# EAGLE board CT_schematic (EAGLE 7.6.0)

Size 100 x 80 mm. Coordinates in mm from the lower left corner, seen from the top.
Outline: 0,0 100,0 100,80 0,80 0,0
Copper layers (1*16): Top 0.035mm / dielectric 1.5mm / Bottom 0.035mm
Design rules "default": minimum track width 10mil, minimum drill 24mil, track to track 8mil, track to pad 8mil, pad to pad 8mil, via to via 8mil, smd to smd 8mil, copper to edge 40mil, drill to drill 8mil, minimum pad ring 10mil, minimum via ring 8mil, stop-mask expansion 4mil, vias tented up to drill 0mil, thermal gap 10mil

## Footprints (pad centres in the part's own frame; a part is rotated, then mirrored left to right if it is on the bottom)
C0603 = smd 0.8 x 0.8: 1 -0.762,0; 2 0.762,0
C0402 = smd 0.5 x 0.5: 1 -0.508,0; 2 0.508,0
C0805 = smd 1.2 x 1.3: 1 -1.016,0; 2 1.016,0
C1210 = smd 1.2 x 2.5: 1 -1.524,0; 2 1.524,0
EXV-9H = smd 3.505 x 1.676: 1 -2.857,0; 2 2.857,0
L0603 = smd 0.8 x 0.8: 1 -0.762,0; 2 0.762,0
L1210 = smd 1.2 x 2.5: 1 -1.524,0; 2 1.524,0
PJ-037B_PACKAGE = drill 3.7 square: 1 12,0 | drill 3.2 square: 2 6,0
R0603 = smd 0.8 x 0.8: 1 -0.762,0; 2 0.762,0
LQFP64 = smd 0.3 x 1.2: 1 -3.75,-5.75; 2 -3.25,-5.75; 3 -2.75,-5.75; 4 -2.25,-5.75; 5 -1.75,-5.75; 6 -1.25,-5.75; 7 -0.75,-5.75; 8 -0.25,-5.75; 9 0.25,-5.75; 10 0.75,-5.75; 11 1.25,-5.75; 12 1.75,-5.75; 13 2.25,-5.75; 14 2.75,-5.75; 15 3.25,-5.75; 16 3.75,-5.75; 33 3.75,5.75; 34 3.25,5.75; 35 2.75,5.75; 36 2.25,5.75; 37 1.75,5.75; 38 1.25,5.75; 39 0.75,5.75; 40 0.25,5.75; 41 -0.25,5.75; 42 -0.75,5.75; 43 -1.25,5.75; 44 -1.75,5.75; 45 -2.25,5.75; 46 -2.75,5.75; 47 -3.25,5.75; 48 -3.75,5.75 | smd 1.2 x 0.3: 17 5.75,-3.75; 18 5.75,-3.25; 19 5.75,-2.75; 20 5.75,-2.25; 21 5.75,-1.75; 22 5.75,-1.25; 23 5.75,-0.75; 24 5.75,-0.25; 25 5.75,0.25; 26 5.75,0.75; 27 5.75,1.25; 28 5.75,1.75; 29 5.75,2.25; 30 5.75,2.75; 31 5.75,3.25; 32 5.75,3.75; 49 -5.75,3.75; 50 -5.75,3.25; 51 -5.75,2.75; 52 -5.75,2.25; 53 -5.75,1.75; 54 -5.75,1.25; 55 -5.75,0.75; 56 -5.75,0.25; 57 -5.75,-0.25; 58 -5.75,-0.75; 59 -5.75,-1.25; 60 -5.75,-1.75; 61 -5.75,-2.25; 62 -5.75,-2.75; 63 -5.75,-3.25; 64 -5.75,-3.75
SOIC-8 = smd 1.6 x 0.6: 1 -2.7,1.905 | smd 1.55 x 0.6: 2 -2.7,0.635; 3 -2.7,-0.635; 4 -2.7,-1.905; 5 2.7,-1.905; 6 2.7,-0.635; 7 2.7,0.635; 8 2.7,1.905
SAMTEC_FTSH-105-01-L-DV-K = smd 0.762 x 2.794: 1 -2.54,-2.032; 2 -2.54,2.032; 3 -1.27,-2.032; 4 -1.27,2.032; 5 0,-2.032; 6 0,2.032; 7 1.27,-2.032; 8 1.27,2.032; 9 2.54,-2.032; 10 2.54,2.032
SSOP-20 = smd 1.651 x 0.432: 1 -3.48,2.925; 2 -3.48,2.275; 3 -3.48,1.625; 4 -3.48,0.975; 5 -3.48,0.325; 6 -3.48,-0.325; 7 -3.48,-0.975; 8 -3.48,-1.625; 9 -3.48,-2.275; 10 -3.48,-2.925; 11 3.48,-2.925; 12 3.48,-2.275; 13 3.48,-1.625; 14 3.48,-0.975; 15 3.48,-0.325; 16 3.48,0.325; 17 3.48,0.975; 18 3.48,1.625; 19 3.48,2.275; 20 3.48,2.925
HTSS-105-01-G-D = drill 1 pad 1.8 square: 1 0,0 | drill 1 pad 1.8: 2 0,2.54; 3 2.54,0; 4 2.54,2.54; 5 5.08,0; 6 5.08,2.54; 7 7.62,0; 8 7.62,2.54; 9 10.16,0; 10 10.16,2.54
QFN-28 = smd 0.813 x 0.305: 1 -2.451,1.5; 2 -2.451,1; 3 -2.451,0.5; 4 -2.451,0; 5 -2.451,-0.5; 6 -2.451,-1; 7 -2.451,-1.5; 15 2.451,-1.5; 16 2.451,-1; 17 2.451,-0.5; 18 2.451,0; 19 2.451,0.5; 20 2.451,1; 21 2.451,1.5 | smd 0.305 x 0.813: 8 -1.5,-2.451; 9 -1,-2.451; 10 -0.5,-2.451; 11 0,-2.451; 12 0.5,-2.451; 13 1,-2.451; 14 1.5,-2.451; 22 1.5,2.451; 23 1,2.451; 24 0.5,2.451; 25 0,2.451; 26 -0.5,2.451; 27 -1,2.451; 28 -1.5,2.451 | smd 3.607 x 3.607: 29 0,0
SJ-43515TS-SMT-TR = smd 2.2 x 3: 1 0.6,-7.4; 4 3.4,-7.4 | smd 3 x 3: 2 12.8,-7.4; 5 17,-3 | smd 2 x 3: 3 5.3,0; 6 2.5,0 | drill 1.8: P$7 4.5,-3.69; P$8 11.54,-3.69
ABLS-25.000MHZ-B2F-T = smd 5.6 x 2.8: 1 -3.81,0; 2 5.69,0
ABLS-12.288MHZ-B4-T = smd 5.6 x 2.8: 1 -3.81,0; 2 5.69,0
ASEK = smd 1.4 x 1: 1 -1.1,-0.8; 2 1.1,-0.8; 3 1.1,0.8; 4 -1.1,0.8
WSON-8 = smd 0.3 x 0.6: 1 -0.75,0; 2 0.05,0; 3 0.85,0; 4 1.65,0; 5 1.65,3.8; 6 0.85,3.8; 7 0.05,3.8; 8 -0.75,3.8 | smd 3 x 2.6: PAD 0.45,1.9
SON-6 = smd 0.55 x 0.3: 1 -0.355,0.5 | smd 0.52 x 0.3: 2 -0.37,0; 3 -0.37,-0.5; 4 0.37,-0.5; 5 0.37,0; 6 0.37,0.5
SW_4-1437565-2 = smd 1.4 x 2.1: 1 -2.23,4.55; 2 -2.23,-4.55; 3 2.23,4.55; 4 2.23,-4.55
LGM67K-G1J2-24-Z = smd 0.8 x 1.4: A -2,0; C 0,0
NC7SZ125M5X = smd 1.3 x 0.7: 1 -1.3,0.95; 2 -1.3,0; 3 -1.3,-0.95; 4 1.3,-0.95; 5 1.3,0.95
DUMMY_PACKAGE_186 = drill 0.3: 1 0,-1; 2 1.5,-1; 3 3,-1

## Placement (x,y rotation side)
C1  1e-06  [C0603]  -48.26,72.39 0 top  (outside the outline)
C2  1e-07  [C0603]  -52.07,72.39 0 top  (outside the outline)
C3  1e-07  [C0603]  -55.88,72.39 0 top  (outside the outline)
C4  1e-07  [C0603]  -59.69,72.39 0 top  (outside the outline)
C5  1e-07  [C0603]  -63.5,72.39 0 top  (outside the outline)
C6  1e-07  [C0603]  -67.31,72.39 0 top  (outside the outline)
C7  4.7e-06  [C0603]  -44.45,72.39 0 top  (outside the outline)
C8  1e-08  [C0603]  -71.12,72.39 0 top  (outside the outline)
C9  1e-06  [C0603]  -74.93,72.39 0 top  (outside the outline)
C10  1e-11  [C0402]  -62.23,77.47 0 top  (outside the outline)
C11  1e-11  [C0402]  -66.04,77.47 0 top  (outside the outline)
C12  1e-08  [C0402]  -69.85,77.47 0 top  (outside the outline)
C13  1e-07  [C0402]  -73.66,77.47 0 top  (outside the outline)
C14  1e-06  [C0603]  -78.74,72.39 0 top  (outside the outline)
C15  1e-06  [C0603]  -15.24,77.47 0 top  (outside the outline)
C16  1e-06  [C0603]  -19.05,77.47 0 top  (outside the outline)
C17  4.7e-06  [C0805]  -53.34,60.96 0 top  (outside the outline)
C18  2.2e-05  [C1210]  -78.74,54.61 0 top  (outside the outline)
C19  2.2e-05  [C1210]  -16.51,60.96 0 top  (outside the outline)
C20  1e-09  [C0402]  -77.47,77.47 0 top  (outside the outline)
C21  1e-09  [C0402]  -81.28,77.47 0 top  (outside the outline)
C22  1e-07  [C0402]  -15.24,82.55 0 top  (outside the outline)
C23  1e-07  [C0402]  -19.05,82.55 0 top  (outside the outline)
C24  1e-07  [C0402]  -22.86,82.55 0 top  (outside the outline)
C25  1e-07  [C0402]  -26.67,82.55 0 top  (outside the outline)
C26  1e-07  [C0402]  -30.48,82.55 0 top  (outside the outline)
C27  1e-05  [C0805]  -58.42,60.96 0 top  (outside the outline)
C28  1e-05  [C0805]  -63.5,60.96 0 top  (outside the outline)
C29  1e-05  [C0805]  -68.58,60.96 0 top  (outside the outline)
C30  1e-05  [C0805]  -73.66,60.96 0 top  (outside the outline)
C31  1e-05  [C0805]  -78.74,60.96 0 top  (outside the outline)
C32  2.2e-11  [C0402]  -54.61,77.47 0 top  (outside the outline)
C33  2.2e-11  [C0402]  -58.42,77.47 0 top  (outside the outline)
C34  1e-08  [C0402]  -34.29,82.55 0 top  (outside the outline)
C35  1e-08  [C0402]  -38.1,82.55 0 top  (outside the outline)
C36  1e-05  [C1210]  -22.86,60.96 0 top  (outside the outline)
C37  1e-05  [C1210]  -29.21,60.96 0 top  (outside the outline)
C38  1e-07  [C0402]  -41.91,82.55 0 top  (outside the outline)
C39  0.0001  [EXV-9H]  -58.42,45.72 0 top  (outside the outline)
C40  0.0001  [EXV-9H]  -69.85,45.72 0 top  (outside the outline)
C41  1e-08  [C0402]  -45.72,82.55 0 top  (outside the outline)
C42  1e-08  [C0402]  -49.53,82.55 0 top  (outside the outline)
F1  240.0  [L0603]  -22.86,77.47 0 top  (outside the outline)
I1  1.5e-05  [L1210]  -35.56,60.96 0 top  (outside the outline)
J1  PJ-037B  [PJ-037B_PACKAGE]  -55.88,21.59 0 top  (outside the outline)
R2  1000.0  [R0603]  -26.67,77.47 0 top  (outside the outline)
R4  4700.0  [R0603]  -30.48,77.47 0 top  (outside the outline)
R5  10000.0  [R0603]  -45.72,67.31 0 top  (outside the outline)
R6  10000.0  [R0603]  -50.8,67.31 0 top  (outside the outline)
R7  10000.0  [R0603]  -55.88,67.31 0 top  (outside the outline)
R8  10000.0  [R0603]  -60.96,67.31 0 top  (outside the outline)
R9  10000.0  [R0603]  -66.04,67.31 0 top  (outside the outline)
R10  10000.0  [R0603]  -71.12,67.31 0 top  (outside the outline)
R11  10000.0  [R0603]  -76.2,67.31 0 top  (outside the outline)
R12  10000.0  [R0603]  -15.24,72.39 0 top  (outside the outline)
R13  5.0  [R0603]  -34.29,77.47 0 top  (outside the outline)
R14  100000.0  [R0603]  -15.24,67.31 0 top  (outside the outline)
R15  100000.0  [R0603]  -20.32,67.31 0 top  (outside the outline)
R16  100000.0  [R0603]  -25.4,67.31 0 top  (outside the outline)
R17  47000.0  [R0603]  -20.32,72.39 0 top  (outside the outline)
R18  47000.0  [R0603]  -25.4,72.39 0 top  (outside the outline)
R19  47000.0  [R0603]  -30.48,72.39 0 top  (outside the outline)
R20  680.0  [R0603]  -38.1,77.47 0 top  (outside the outline)
R21  100000.0  [R0603]  -30.48,67.31 0 top  (outside the outline)
R22  2231.0  [R0603]  -41.91,77.47 0 top  (outside the outline)
R23  1000.0  [R0603]  -45.72,77.47 0 top  (outside the outline)
R24  10000.0  [R0603]  -35.56,72.39 0 top  (outside the outline)
R25  10000.0  [R0603]  -40.64,72.39 0 top  (outside the outline)
R26  9100.0  [R0603]  -49.53,77.47 0 top  (outside the outline)
R27  680000.0  [R0603]  -35.56,67.31 0 top  (outside the outline)
R28  120000.0  [R0603]  -40.64,67.31 0 top  (outside the outline)
U1  STM32F303RDT6  [LQFP64]  -68.58,21.59 0 top  (outside the outline)
U2  AT25010B-SSHL-T  [SOIC-8]  -62.23,34.29 0 top  (outside the outline)
U3  FTSH-105-01-L-DV-K  [SAMTEC_FTSH-105-01-L-DV-K]  -35.56,7.62 0 top  (outside the outline)
U4  MAX3218EAP+T  [SSOP-20]  -72.39,33.02 0 top  (outside the outline)
U5  HTSS-105-01-G-D  [HTSS-105-01-G-D]  -46.99,33.02 0 top  (outside the outline)
U6  WM8731CLSEFL  [QFN-28]  -71.12,54.61 0 top  (outside the outline)
U7  SJ-43515TS-SMT-TR  [SJ-43515TS-SMT-TR]  -68.58,10.16 0 top  (outside the outline)
U8  SJ-43515TS-SMT-TR  [SJ-43515TS-SMT-TR]  -39.37,24.13 0 top  (outside the outline)
U9  ABLS-25.000MHZ-B2F-T  [ABLS-25.000MHZ-B2F-T]  -26.67,54.61 0 top  (outside the outline)
U10  ABLS-12.288MHZ-B4-T  [ABLS-12.288MHZ-B4-T]  -46.99,54.61 0 top  (outside the outline)
U11  ASEK-32.768KHz-ECST  [ASEK]  -49.53,45.72 0 top  (outside the outline)
U12  LP3878SDX-ADJ/NOPB  [WSON-8]  -30.48,44.45 0 top  (outside the outline)
U13  TPS3895ADRYR  [SON-6]  -58.42,81.28 0 top  (outside the outline)
U14  4-1437565-2  [SW_4-1437565-2]  -27.94,35.56 0 top  (outside the outline)
U15  Q65110A2395  [LGM67K-G1J2-24-Z]  -58.42,54.61 0 top  (outside the outline)
U16  nc7sz125m5x  [NC7SZ125M5X]  -40.64,60.96 0 top  (outside the outline)
U17  nc7sz125m5x  [NC7SZ125M5X]  -46.99,60.96 0 top  (outside the outline)
U18  Dummy  [DUMMY_PACKAGE_186]  -55.88,82.55 0 top  (outside the outline)

## Library data of the parts
C1-C42 F1 I1 J1 R2 R4-R28 U1-U18 = circuit_tree

## Nets
CLK_CRYSTAL_U1_5: C10.1 U1.5 U9.1
CLK_CRYSTAL_U1_6: C11.1 U1.6 U9.2
CLK_CRYSTAL_U6_1: C32.1 U6.1 U10.1
CLK_CRYSTAL_U6_2: C33.1 U6.2 U10.2
CLK_U1_3: U1.3 U11.3
GND: C1.2 C2.2 C3.2 C4.2 C5.2 C6.2 C7.2 C8.2 C9.2 C10.2 C11.2 C12.2 C13.2 C14.2 C15.2 C16.2 C21.2 C22.2 C23.2 C24.2 C25.2 C26.2 C27.2 C28.2 C29.2 C30.2 C31.2 C32.2 C33.2 C34.2 C35.2 C36.2 C37.2 C38.2 C39.2 C40.2 C41.2 C42.2 J1.2 R2.2 R5.2 R12.2 R13.2 R17.2 R18.2 R19.2 R23.2 R26.2 R28.2 U1.12 U1.18 U1.31 U1.47 U1.63 U2.4 U3.3 U3.5 U4.5 U4.17 U4.20 U5.9 U6.4 U6.15 U6.19 U6.25 U6.26 U6.29 U7.1 U8.1 U11.2 U12.3 U12.PAD U13.2 U15.C U16.2 U16.3 U17.1 U17.3 U18.1
NET_U1_7: R4.1 U1.7 U17.4
NET_U1_13: C8.1 C9.1 F1.1 U1.13
NET_U1_60: R5.1 U1.60
NET_U1_61: U15.A
NET_U1_62: U14.3 U14.4
NET_U2_3: R6.1 U2.3
NET_U2_7: R8.1 U2.7
NET_U3_9: R13.1 U3.9
NET_U4_1: I1.1 U4.1
NET_U4_2: R14.1 U4.2
NET_U4_3: R15.1 U4.3
NET_U4_4: R16.1 U4.4
NET_U4_15: C16.1 U4.15
NET_U4_16: C17.2 U4.16
NET_U4_18: C17.1 U4.18
NET_U4_19: C15.1 U4.19
NET_U5_3: U4.12 U5.3
NET_U5_4: U4.11 U5.4
NET_U5_5: U4.14 U5.5
NET_U5_6: U4.13 U5.6
NET_U6_9: U6.9
NET_U6_20: C26.1 C31.1 U6.20
NET_U7_2: C19.1 R18.1 U7.2
NET_U7_5: C18.1 R17.1 U7.5
NET_U7_13: C18.2
NET_U7_14: C19.2
NET_U8_5: C20.1 C21.1 R19.1 R20.1 U8.5
NET_U8_21: R20.2
NET_U8_22: C20.2
NET_U12_1: C35.1 U12.1
NET_U12_6: R22.2 R23.1 U12.6
NET_U12_8: R21.1 U12.8
NET_U13_1: R25.1 R26.1 U13.1
NET_U13_3: R27.2 R28.1 U13.3
NET_U13_4: R24.1 U13.4 U16.4 U17.2
NET_U14_1: R2.1 U14.1 U14.2
PROC_ADC1_IN1: U1.14 U18.3
PROC_ADC1_IN2: U1.15 U18.2
PROC_I2S2_CK: U1.34 U6.7
PROC_I2S2_EXT_SD: U1.35 U6.10
PROC_I2S2_SD: U1.36 U6.8
PROC_I2S2_WS: U1.33 U6.9 U6.11
PROC_SPI1_MISO: U1.22 U2.2
PROC_SPI1_MOSI: U1.23 U2.5
PROC_SPI1_NSS: R7.1 U1.20 U2.1
PROC_SPI1_SCK: U1.21 U2.6
PROC_SYS_JTCK_SWCLK: R12.1 U1.49 U3.4
PROC_SYS_JTDI: R10.1 U1.50 U3.8
PROC_SYS_JTDO_TRACESWO: U1.55 U3.6
PROC_SYS_JTMS_SWDIO: R11.1 U1.46 U3.2
PROC_UART4_RX: U1.52 U4.9
PROC_UART4_TX: U1.51 U4.7
RST_OUT_U3_JTAG_RST_B: R9.1 U3.10 U16.1
VCC_S1_15V0: C36.1 C39.1 C40.1 J1.1 R21.2 U12.4
VCC_TIER1_3V3: C1.1 C2.1 C3.1 C4.1 C5.1 C6.1 C7.1 C12.1 C13.1 C14.1 C22.1 C23.1 C24.1 C25.1 C27.1 C28.1 C29.1 C30.1 C34.1 C37.1 C38.1 C41.1 C42.1 F1.2 I1.2 R4.2 R6.2 R7.2 R8.2 R9.2 R10.2 R11.2 R14.2 R15.2 R16.2 R22.1 R24.2 R25.2 R27.1 U1.1 U1.19 U1.32 U1.48 U1.64 U2.8 U3.1 U4.6 U6.3 U6.5 U6.12 U6.18 U11.4 U12.5 U13.6 U16.5 U17.5

## Tracks (layer width: path | path; a pad name or v marks a point on that pad's centre or on a via)
CLK_CRYSTAL_U1_5  (2 unrouted)
CLK_CRYSTAL_U1_6  (2 unrouted)
CLK_CRYSTAL_U6_1  (2 unrouted)
CLK_CRYSTAL_U6_2  (2 unrouted)
CLK_U1_3  (1 unrouted)
GND  (78 unrouted)
NET_U1_7  (2 unrouted)
NET_U1_13  (3 unrouted)
NET_U1_60  (1 unrouted)
NET_U1_62  (1 unrouted)
NET_U2_3  (1 unrouted)
NET_U2_7  (1 unrouted)
NET_U3_9  (1 unrouted)
NET_U4_1  (1 unrouted)
NET_U4_2  (1 unrouted)
NET_U4_3  (1 unrouted)
NET_U4_4  (1 unrouted)
NET_U4_15  (1 unrouted)
NET_U4_16  (1 unrouted)
NET_U4_18  (1 unrouted)
NET_U4_19  (1 unrouted)
NET_U5_3  (1 unrouted)
NET_U5_4  (1 unrouted)
NET_U5_5  (1 unrouted)
NET_U5_6  (1 unrouted)
NET_U6_20  (2 unrouted)
NET_U7_2  (2 unrouted)
NET_U7_5  (2 unrouted)
NET_U8_5  (4 unrouted)
NET_U12_1  (1 unrouted)
NET_U12_6  (2 unrouted)
NET_U12_8  (1 unrouted)
NET_U13_1  (2 unrouted)
NET_U13_3  (2 unrouted)
NET_U13_4  (3 unrouted)
NET_U14_1  (2 unrouted)
PROC_ADC1_IN1  (1 unrouted)
PROC_ADC1_IN2  (1 unrouted)
PROC_I2S2_CK  (1 unrouted)
PROC_I2S2_EXT_SD  (1 unrouted)
PROC_I2S2_SD  (1 unrouted)
PROC_I2S2_WS  (2 unrouted)
PROC_SPI1_MISO  (1 unrouted)
PROC_SPI1_MOSI  (1 unrouted)
PROC_SPI1_NSS  (2 unrouted)
PROC_SPI1_SCK  (1 unrouted)
PROC_SYS_JTCK_SWCLK  (2 unrouted)
PROC_SYS_JTDI  (2 unrouted)
PROC_SYS_JTDO_TRACESWO  (1 unrouted)
PROC_SYS_JTMS_SWDIO  (2 unrouted)
PROC_UART4_RX  (1 unrouted)
PROC_UART4_TX  (1 unrouted)
RST_OUT_U3_JTAG_RST_B  (2 unrouted)
VCC_S1_15V0  (5 unrouted)
VCC_TIER1_3V3  (55 unrouted)